# Altium PCB Red.PcbDoc (part 1 of 3)
Units mm, origin at the board's own origin, x right, y up, seen from the top; angles counter-clockwise.
Board outline 152.4 x 101.6 mm, 4 copper layers (Top Layer, VCC, GND, Bottom Layer); 97 components, 56 nets, 284 pads, 185 vias.
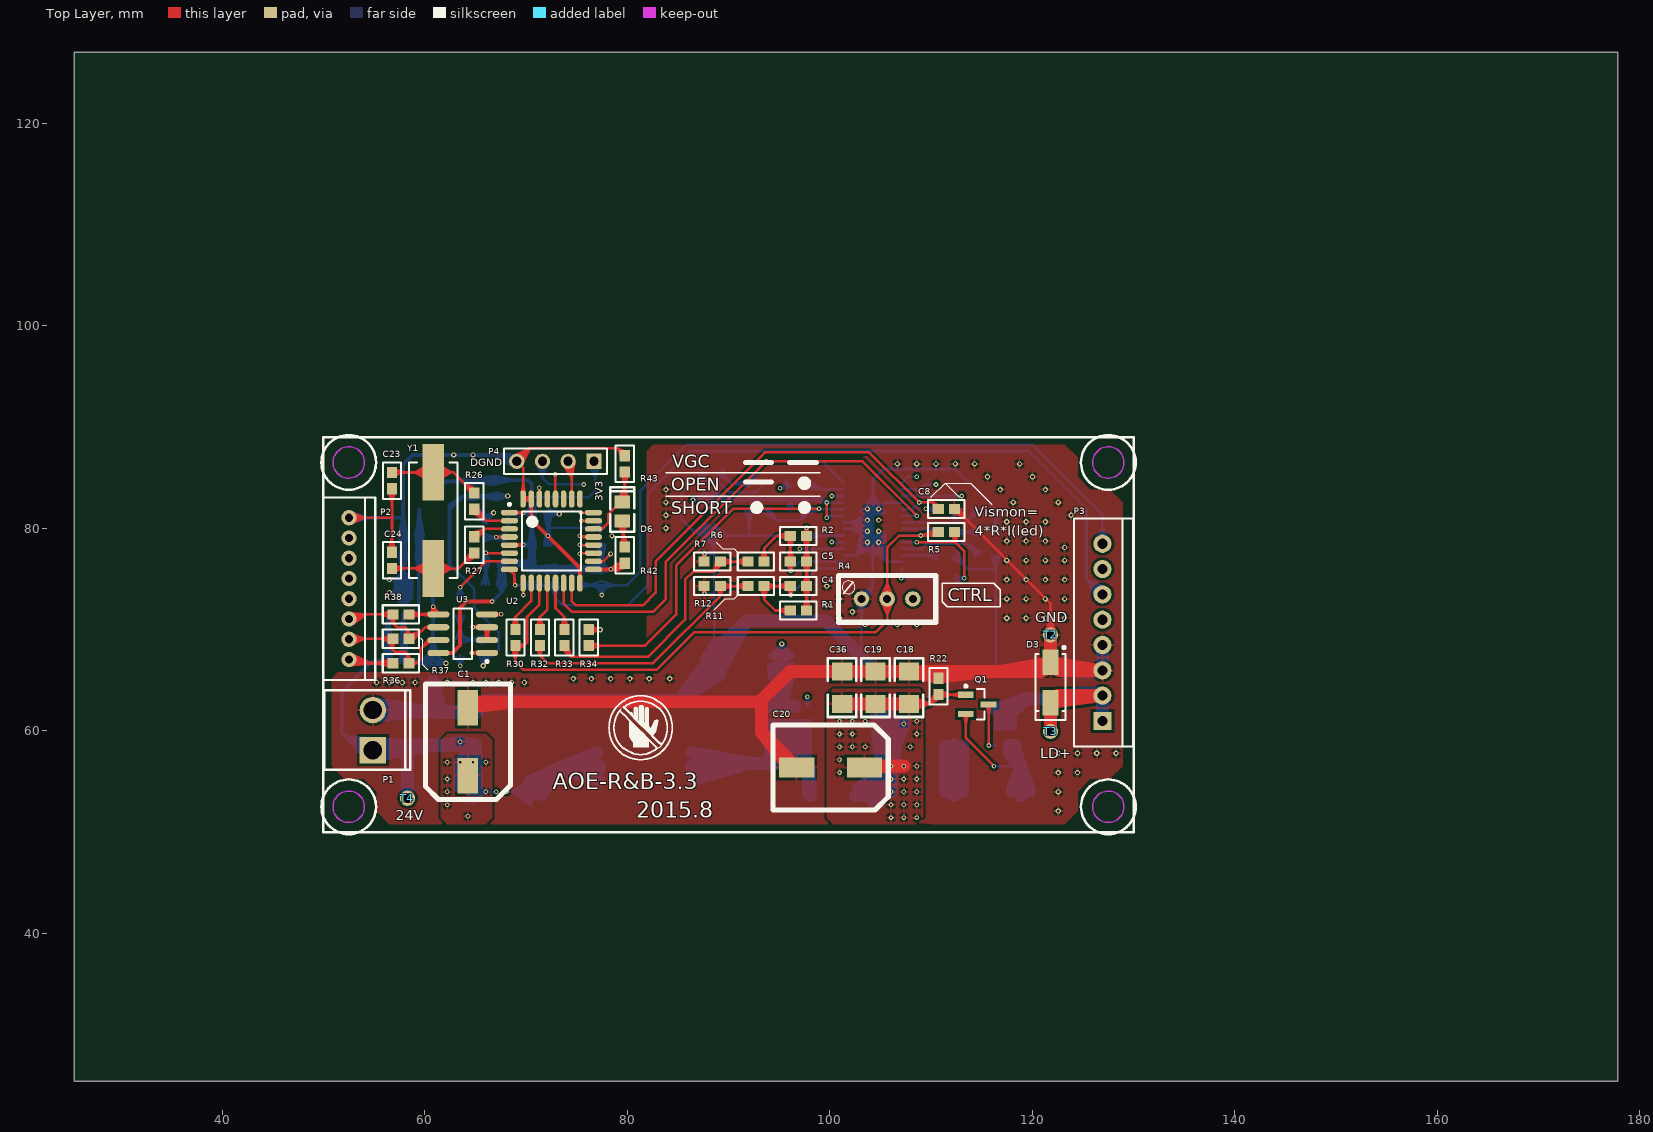
[diagram p0: Top Layer view]
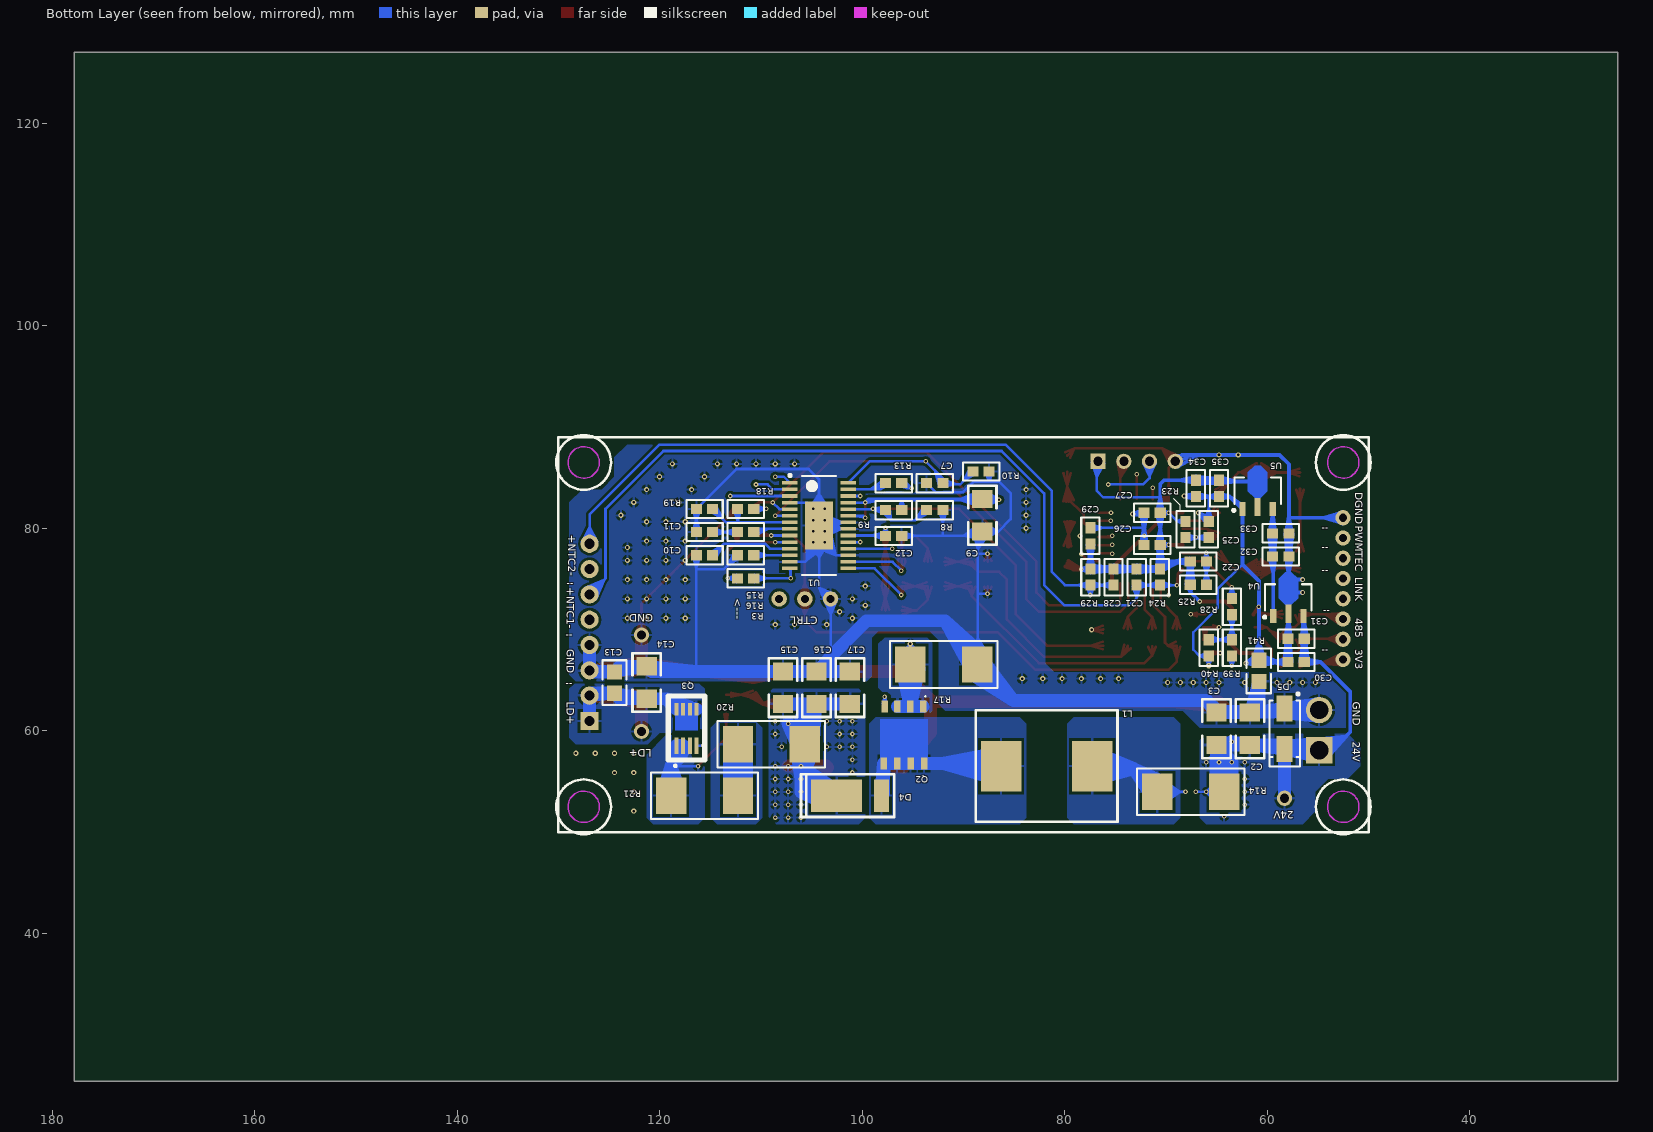
[diagram p1: Bottom Layer view, seen from below]
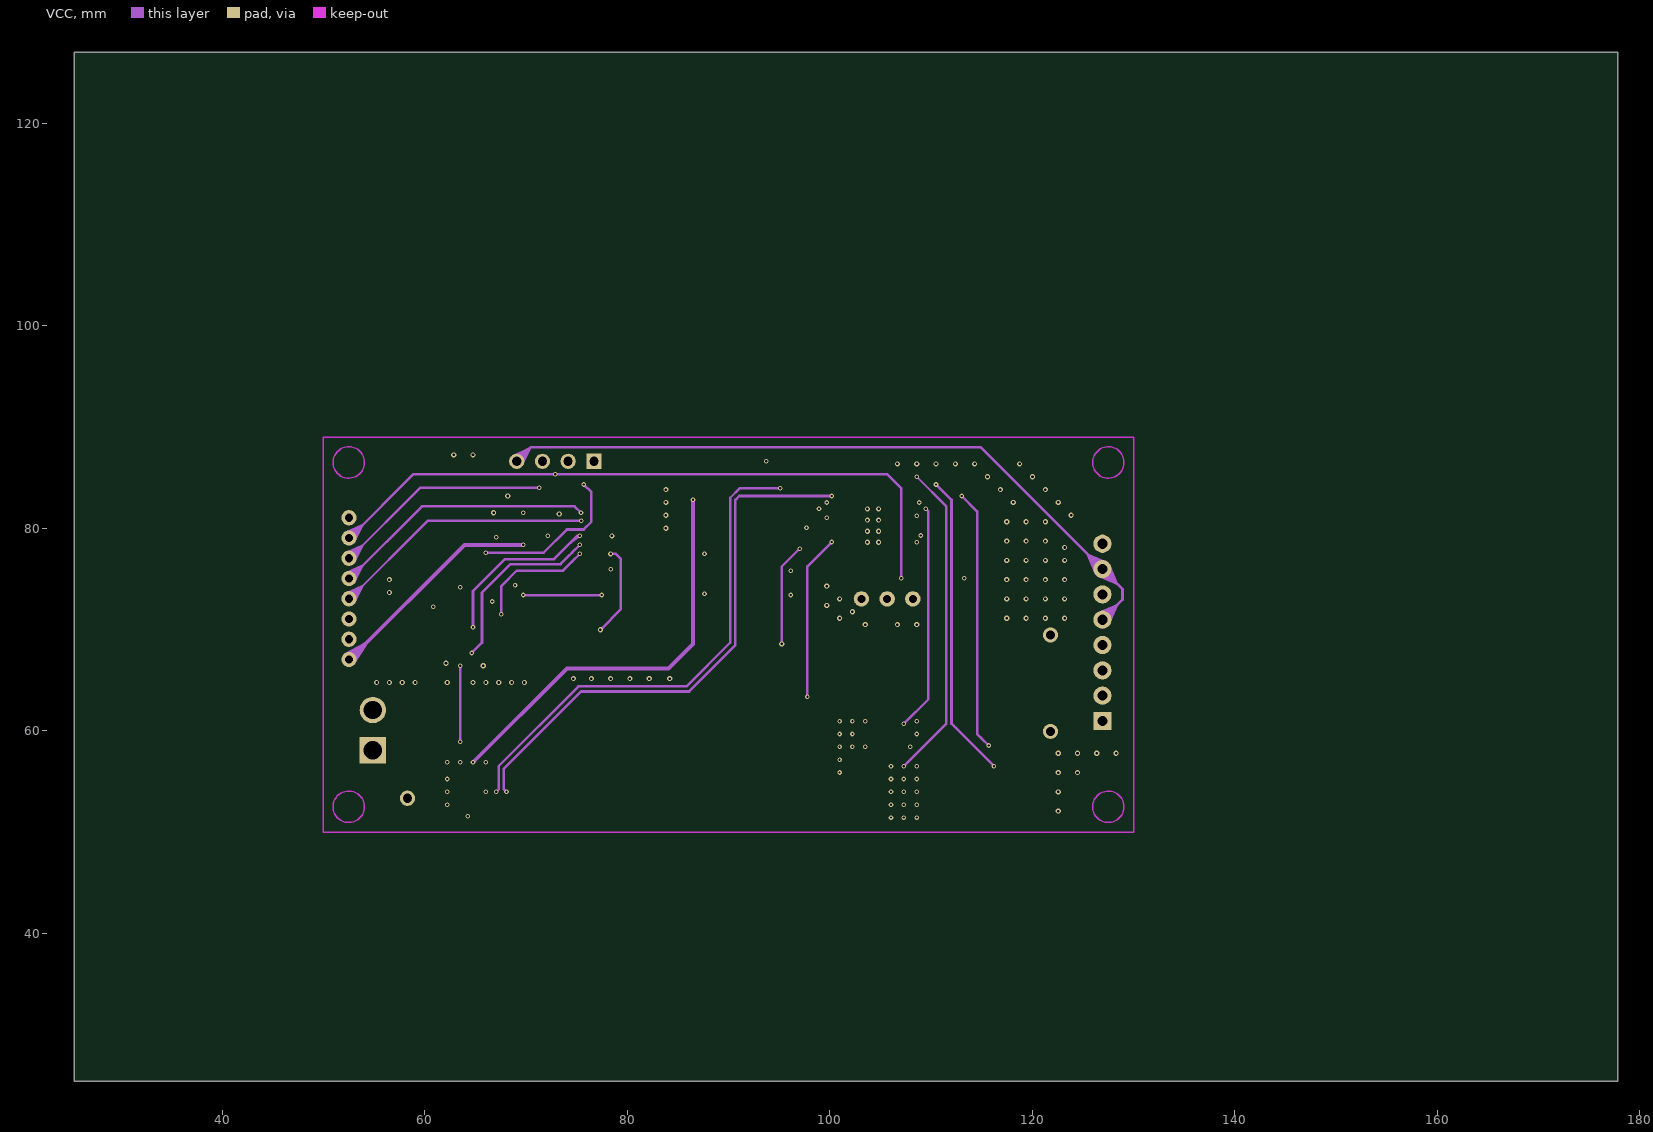
[diagram p2: VCC]
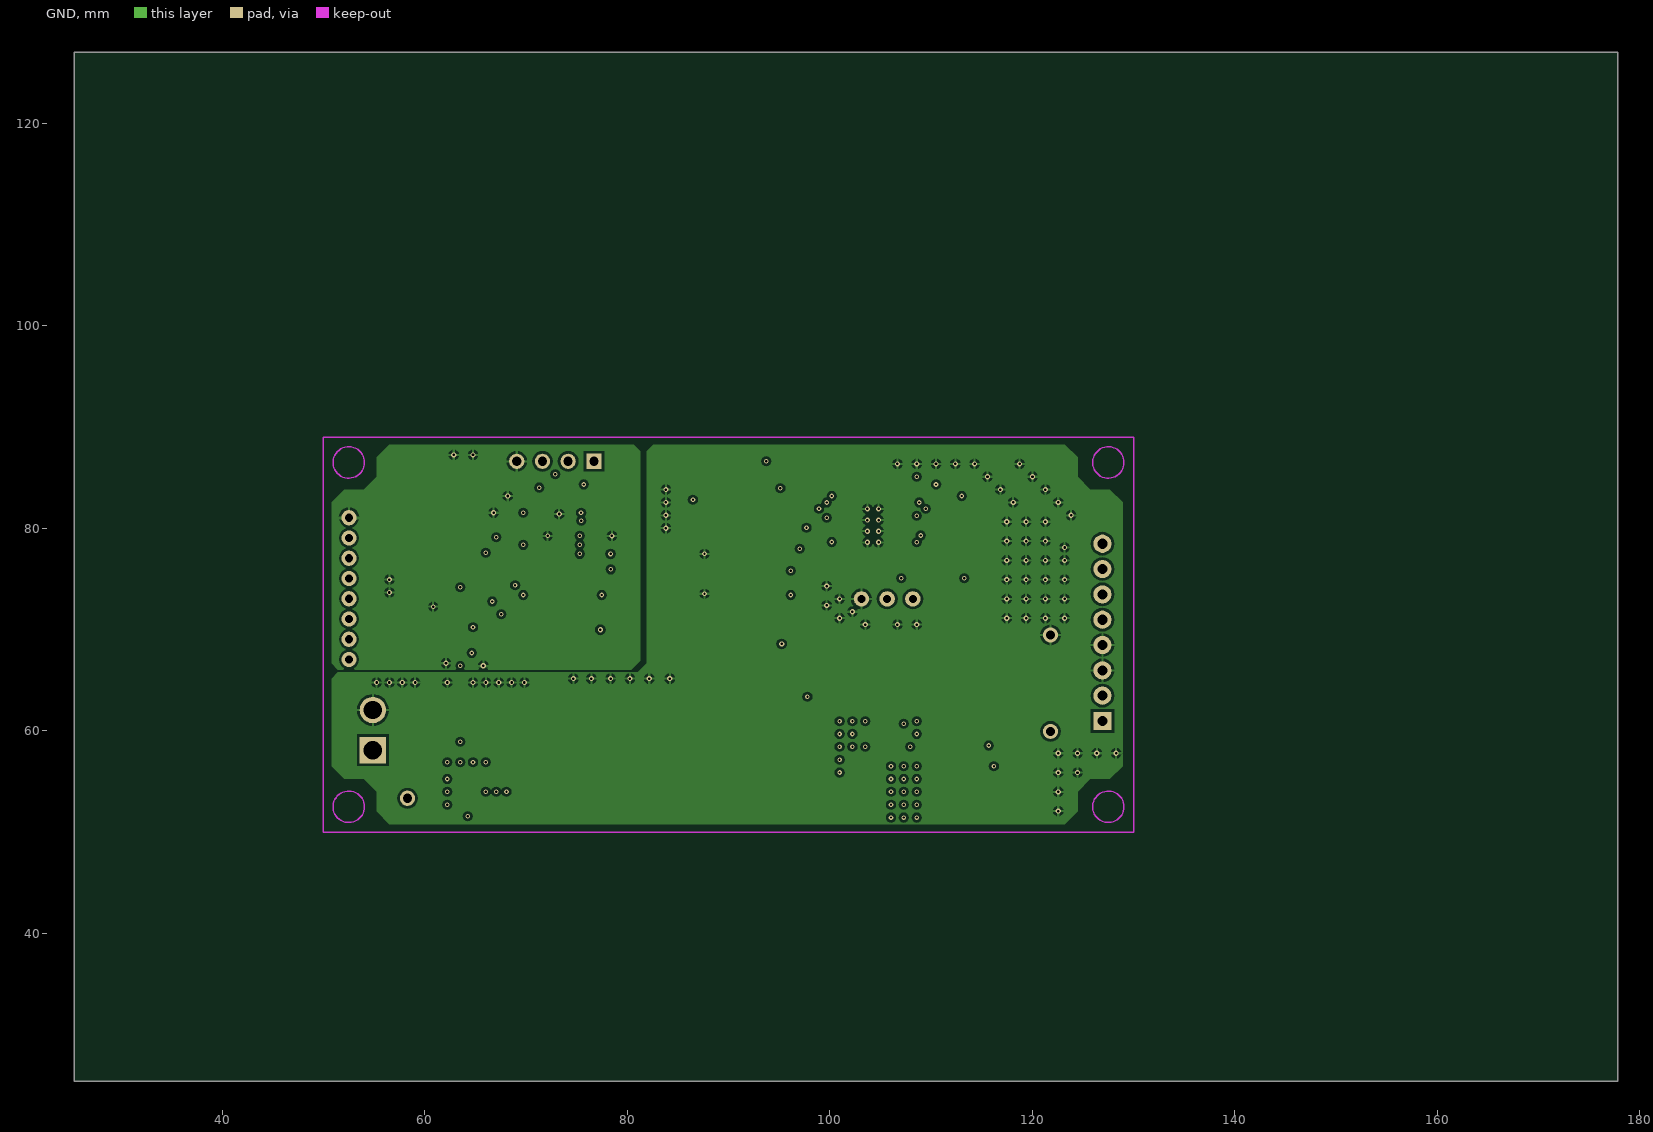
[diagram p3: GND]

## Layer stack, top to bottom
Top Layer: signal copper 0.0356
Dielectric: core 0.32, FR-4, Dk 4.8
VCC: signal copper 0.0356
Dielectric: prepreg 0.32, FR-4, Dk 4.8
GND: signal copper 0.0356
Dielectric: core 0.32, FR-4, Dk 4.8
Bottom Layer: signal copper 0.0356

## Board outline
25.4,25.4 177.8,25.4 177.8,127 25.4,127

## Design rules (kind name [scope] priority, off if disabled: settings)
Clearance [All] p1: gap=0.254
DiffPairsRouting [All] p1: maxlimit=0.254 minlimit=0.254 mostfreqgap=0.254 maxuncoupledlength=12.7
HoleSize [All] p1: absolutevalues=TRUE maxlimit=2.54 minlimit=0.198 maxpercent=80.000 minpercent=20.000
PolygonConnect [All] p1: connectstyle=Relief reliefconductorwidth=0.254 reliefentries=4 polygonreliefangle="90 Angle" airgapwidth=0.254
RoutingVias [All] p1: holewidth=0.711 width=1.27 viastyle="Through Hole" minholewidth=0.711 minwidth=1.27 maxholewidth=0.711 maxwidth=1.27
SolderMaskExpansion [All] p1: expansion=0.102
Width [All] p1: maxlimit=1.27 minlimit=0.203 preferedwidth=0.254 midlayer1_minwidth=0.254 midlayer1_maxwidth=0.381 midlayer2_minwidth=0.254 midlayer2_maxwidth=0.381 minimp=50.000000 maximp=50.000000 favimp=50.000000
26 further rules are at their usual default settings.

## Classes and differential pairs
component class PWR: C30 C31 C32 C33 C34 C35 D5 D6 P1 P2 P3 R39 R40 R41 R42 R43 T4 U4 U5
component class MCU: C21 C22 C23 C24 C25 C26 C27 C28 C29 P4 R23 R24 R25 R26 R27 R28 R29 R30 R32 R33 R34 R36 R37 R38 U2 U3 Y1
component class 3796: C1 C2 C3 C4 C5 C7 C8 C9 C10 C11 C12 C13 C14 C15 C16 C17 C18 C19 C20 C36 Ctrl D3 D4 L1 Q1 Q2 Q3 R1 R2 R3 R4 R5 R6 R7 R8 R9 R10 R11 R12 R13 R14 R15 R16 R17 R18 R19 R20 R21 R22 T2 T3 U1
differential pair CS: +CS_P -CS_N
differential pair 485: +485_P -485_N
differential pair CLK: +CLK_P -CLK_N
differential pair IS: +IS_P -IS_N
differential pair OSC: +OSC_P -OSC_N

## Components (designator, comment, footprint, x,y, rotation, side; value= is the part's Value field where it differs from the comment)
C1 "NoPop" "SMC_Altium Capacity 8*10" 64.262,58.928 r180 top
C2 "47uF/50V" "1206[3216] - NP" 61.722,60.198 r270 bottom
C3 "22uF/50V" "1206[3216] - NP" 65.024,60.198 r270 bottom
C4 "100nF" 1608[0603] 96.901,74.295 r0 top
C5 "100nF" 1608[0603] 96.901,76.708 r180 top
C7 "10nF" 1608[0603] 92.837,84.455 r180 bottom
C8 "100nF" 1608[0603] 111.506,81.915 r180 top
C9 "4.7uF/50V" "1206[3216] - NP" 88.138,81.28 r90 bottom
C10 "1uF" 1608[0603] 115.57,77.343 r0 bottom
C11 "10nF" 1608[0603] 115.57,79.629 r0 bottom
C12 "100nF" 1608[0603] 96.901,79.248 r180 bottom
C13 "2.2uF/50V" 2012[0805] 124.46,64.77 r270 bottom
C14 "NoPop" "1206[3216] - NP" 121.285,64.77 r270 bottom
C15 "47uF/50V" "1206[3216] - NP" 107.823,64.262 r270 bottom
C16 "22uF/50V" "1206[3216] - NP" 104.521,64.262 r270 bottom
C17 "22uF/50V" "1206[3216] - NP" 101.219,64.262 r270 bottom
C18 "100uF/50V" "1206[3216] - NP" 107.823,64.262 r270 top
C19 "100uF/50V" "1206[3216] - NP" 104.521,64.262 r270 top
C20 "NoPop" "SMC_Altium Capacity 8*10" 100.076,56.388 r270 top
C21 "100nF" 1608[0603] 72.898,75.184 r270 bottom
C22 "100nF" 1608[0603] 66.802,76.708 r180 bottom
C23 "20pF" 1608[0603] 56.769,84.709 r270 top
C24 "20pF" 1608[0603] 56.769,76.835 r90 top
C25 "100nF" 1608[0603] 65.786,79.883 r270 bottom
C26 "100nF" 1608[0603] 71.374,78.359 r0 bottom
C27 "100nF" 1608[0603] 71.374,81.534 r180 bottom
C28 "100nF" 1608[0603] 75.184,75.184 r270 bottom
C29 "100nF" 1608[0603] 77.47,79.248 r270 bottom
C30 "22uF" 1608[0603] 57.15,66.802 r180 bottom
C31 "22uF" 1608[0603] 57.15,69.088 r180 bottom
C32 "10uF" 1608[0603] 58.674,77.216 r0 bottom
C33 "100nF" 1608[0603] 58.674,79.502 r0 bottom
C34 "22uF" 1608[0603] 67.056,83.947 r90 bottom
C35 "10uF" 1608[0603] 64.77,83.947 r90 bottom
C36 "100uF/50V" "1206[3216] - NP" 101.219,64.262 r270 top
D3 "SMAJ36CA" SMA_DIOM5226X26N 121.793,64.77 r270 top
D4 "PDS5100" PowerDI5 99.441,53.594 r0 bottom
D5 "SMAJ26CA" SMA_DIOM5226X26N 58.293,60.198 r270 bottom
D6 "LED" "2012[0805] - LED" 79.502,81.661 r90 top
L1 "IHLP-4040DZ-11" IHLP4040 81.788,56.515 r0 bottom
P1 "VH Connector, B2P-VH" 2PIN-B2P_VH 60.579,60.071 r90 top
P2 "HY-8AD" "8P -HY-8AD" 55.118,74.041 r90 top
P3 "TJC3B-8AD" 8P-TJC3B8AD 129.921,69.723 r90 top locked
P4 "Header 4" HDR1X4 76.708,86.614 r180 top
Q1 "2N2907" SOT95P280X115-3N 114.554,62.611 r0 top
Q2 "BSC160N10NS3 G" INF-PG-TDSON-8-1_V 95.885,59.563 r0 bottom
Q3 "Si7113dn" "1212-8 SINGLE" 117.348,59.436 r90 bottom
R1 "100K" 1608[0603] 96.901,71.882 r180 top
R2 "100K" 1608[0603] 96.901,79.248 r180 top
R3 "50" 1608[0603] 111.506,75.057 r180 bottom
R4 "20K" RES-adj 105.664,73.025 r0 top
R5 "NoPop" 1608[0603] 111.506,79.629 r180 top
R6 "100K" 1608[0603] 92.71,76.708 r0 top
R7 "100K" 1608[0603] 88.392,76.708 r0 top
R8 "2K" 1608[0603] 92.837,81.788 r180 bottom
R9 "NoPop" 1608[0603] 96.901,81.788 r180 bottom
R10 "200K" 1608[0603] 88.265,85.598 r0 bottom
R11 "100K" 1608[0603] 92.71,74.295 r0 top
R12 "100K" 1608[0603] 88.392,74.295 r0 top
R13 "6K" 1608[0603] 96.901,84.455 r0 bottom
R14 "0.01" 2512[6432] 67.564,53.975 r270 bottom
R15 "10K" 1608[0603] 111.506,79.629 r0 bottom
R16 "20K" 1608[0603] 111.506,77.343 r0 bottom
R17 "0.02" 2512[6432] 91.948,66.548 r270 bottom
R18 "620K" 1608[0603] 111.506,81.915 r180 bottom
R19 "20K" 1608[0603] 115.57,81.915 r0 bottom
R20 "0.05" 2512[6432] 108.966,58.674 r90 bottom
R21 "0.2" 2512[6432] 115.57,53.594 r90 bottom
R22 "2M" 1608[0603] 110.744,64.389 r270 top
R23 "10k" 1608[0603] 68.072,79.883 r90 bottom
R24 "3K3" 1608[0603] 70.612,75.184 r270 bottom
R25 "3K3" 1608[0603] 66.802,74.422 r180 bottom
R26 "0" 1608[0603] 64.897,82.677 r270 top
R27 "390" 1608[0603] 64.897,78.359 r90 top
R28 "1K" 1608[0603] 63.5,72.263 r90 bottom
R29 "3K3" 1608[0603] 77.47,75.184 r270 bottom
R30 "20K" 1608[0603] 68.961,69.215 r270 top
R32 "1K" 1608[0603] 71.374,69.215 r270 top
R33 "1K" 1608[0603] 73.787,69.215 r270 top
R34 "50" 1608[0603] 76.2,69.215 r270 top
R36 "3K3" 1608[0603] 57.658,66.675 r180 top
R37 "120" 1608[0603] 57.658,69.088 r180 top
R38 "3K3" 1608[0603] 57.658,71.501 r180 top
R39 "50K" 1608[0603] 63.5,68.199 r90 bottom
R40 "2K" 1608[0603] 65.786,68.199 r270 bottom
R41 "0" 2012[0805] 60.833,65.913 r270 bottom
R42 "3K3" 1608[0603] 79.756,77.343 r270 top
R43 "3K3" 1608[0603] 79.756,86.36 r90 top
T2 "Test Point" TestPoint 121.793,69.469 r0 top
T3 "Test Point" TestPoint 121.793,59.944 r0 top
T4 "Test Point" TestPoint 58.293,53.34 r0 top
U1 "PWR_LT3796_Boost" TSOP65P640X120_HS-29N 104.267,80.264 r180 bottom
U2 "STM32F051K8T6" TQFP80P900X900X160-32N 72.517,78.74 r0 top
U3 "SP3485EN" SOIC127P600-8N 63.754,69.596 r180 top
U4 "L78L05" SOT89-150P410X160-3N 57.912,73.152 r90 bottom
U5 "AMS1117-3.3V" SOT89-150P410X160-3N 60.96,83.693 r90 bottom
Y1 "XTAL" XTAL_SMT 60.833,80.772 r90 top

## Footprints (in the part's own frame and the unit in brackets; to place one, negate y for a bottom-side part, rotate by r counter-clockwise, add the part's x,y. Pads: shape width x height; smd on the part's side, far side on the other; paste and mask are expansions set on the pad)
2PIN-B2P_VH [mm] "2PIN-B2P_VH"
  rect 2.6x2.6 hole 1.8: 1(-1.98,5.7)
  round 2.6 hole 1.8: 2(1.98,5.7)
  silkscreen extent -3.93,2 3.93,10.5
"8P -HY-8AD" [mm] "8Pin, HY-8AD"
  round 1.5 hole 0.8: 1(-7,2.6) 2(-5,2.6) 3(-3,2.6) 4(-1,2.6) 5(1,2.6) 6(3,2.6) 7(5,2.6) 8(7,2.6)
  silkscreen extent -9,0 9,5.1
8P-TJC3B8AD [mm] "8Pin Connector, TJC3B8AD"
  rect 1.8x1.8 hole 1: 1(-8.75,3)
  round 1.8 hole 1: 2(-6.25,3) 3(-3.75,3) 4(-1.25,3) 5(1.25,3) 6(3.75,3) 7(6.25,3) 8(8.75,3)
  silkscreen extent -11.25,0 11.25,5.8
"1206[3216] - NP" [mm] "Chip Resistor; Body 3.2 x 1.6 mm (LxW typ)"
  rect 1.8x2 smd: 1(-1.6,0) 2(1.6,0)
  silkscreen extent -2.9,-1.4 2.9,1.4, body extent -2.2,-0.8 2.2,0.8, height 3
"1212-8 SINGLE" [mm] "P-Channel 100-V (D-S) MOSFET"
  rect 1.6x0.405 smd: 1(-0.9,0.99) 2(-0.9,0.33) 3(-0.9,-0.33) 4(-0.9,-0.99)
  rect 1.2x0.405 smd: 5(2.7,-0.99) 6(2.7,-0.33) 7(2.7,0.33) 8(2.7,0.99)
  Top Layer region: 0.637,-1.12 2.362,-1.12 2.362,1.12 0.637,1.12
  silkscreen extent -3,-1.8 4,1.8
1608[0603] [mm]
  rect 1.1x1 smd: 1(-0.8,0) 2(0.8,0)
  silkscreen extent -1.8,-0.9 1.8,0.9
2012[0805] [mm] "Chip Resistor; Body 2.0 x 1.3 mm (LxW typ)"
  rect 1.5x1.5 smd: 1(-1.05,0) 2(1.05,0)
  silkscreen extent -2.2,-1.2 2.2,1.2, body extent -1.8,-0.7 1.8,0.7, height 3
"2012[0805] - LED" [mm] "Chip Resistor; Body 2.0 x 1.3 mm (LxW typ)"
  rect 1.3x1.5 smd: 1(-0.95,0) 2(0.95,0)
  silkscreen extent -2,-1.2 2.4,1.2
2512[6432] [mm] "6.4*3.2"
  rect 3.6x3 smd: 1(0,3.3) 2(0,-3.3)
  silkscreen extent -2.3,-5.3 2.3,5.3
HDR1X4 [mm] "Connector; Header; 4 Position"
  rect 1.5x1.5 hole 0.9: 1(0,0)
  round 1.5 hole 0.9: 2(2.54,0) 3(5.08,0) 4(7.62,0)
  silkscreen extent -1.27,-1.27 8.89,1.27
IHLP4040 [mm] "Inductor, IHLP5050CEER1R0M01"
  rect 4x5 smd: 1(-4.5,0) 2(4.5,0)
  silkscreen extent -7,-5.5 7,5.5
INF-PG-TDSON-8-1_V [mm] "TDSON, 8-Leads, Body 6.15x5.15mm, Pitch 1.27mm"
  rect 0.65x1.2 smd: 1(-1.905,-2.825) 2(-0.635,-2.825) 3(0.635,-2.825) 4(1.905,-2.825) 5(2.007,2.794) 6(0.66,2.794) 7(-0.66,2.794) 8(-2.007,2.794)
  Top Layer region: -2.35,2.925 -2.35,-1.575 2.35,-1.575 2.35,2.925
  Top Layer region: -2.35,2.925 -1.65,2.925 -1.65,3.425 -2.35,3.425
  Top Layer region: 1.65,2.925 2.35,2.925 2.35,3.425 1.65,3.425
  Top Layer region: -1.015,2.925 -0.315,2.925 -0.315,3.425 -1.015,3.425
  Top Layer region: 0.315,2.925 1.015,2.925 1.015,3.425 0.315,3.425
  silkscreen extent -2.23,-3.94 -2.03,-3.74, body extent -2.58,-3.08 2.58,3.08, height 1
PowerDI5 [mm]
  rect 1.5x3.2 smd: 1(-1.35,0)
  rect 5x3.2 smd: 2(3.1,0)
  silkscreen extent -2.6,-2.1 6.6,2.1
RES-adj [mil]
  round 60 hole 31.5: 1(-100,0) 2(0,0) 3(100,0)
  silkscreen extent -189,-91 189,91
SMA_DIOM5226X26N [mm] "Molded Diode, 2-Leads, Body 5.20x2.61mm, IPC Medium Density"
  rect 2.55x1.55 smd: 1(-2,0) 2(2,0)
  silkscreen extent -3.57,-1.5 3.7,1.5, body extent -2.8,-1.46 2.79,1.46, height 2.62
"SMC_Altium Capacity 8*10" [mm] "SMC_Altium Capcitor, 8*10"
  rect 2x3.5 smd: 1(0,3.35) 2(0,-3.35)
  silkscreen extent -4.2,-5.7 4.2,5.7
SOIC127P600-8N [mm]
  oval 2.2x0.6 smd: 1(-2.4,1.905) 2(-2.4,0.635) 3(-2.4,-0.635) 4(-2.4,-1.905) 5(2.4,-1.905) 6(2.4,-0.635) 7(2.4,0.635) 8(2.4,1.905)
  silkscreen extent -2.53,-2.5 0.9,2.88, body extent -2,-2.5 2,2.5, height 1.75
SOT89-150P410X160-3N [mm] "SOT89, 3-Leads, Body 4.50x2.45mm, Pitch 1.50mm, Lead Span 4.1mm, IPC Medium Density"
  rect 1.4x0.6 smd: 1(-1.8,1.5) 3(-1.8,-1.5)
  rect 1.8x0.6 smd: 2(-1.6,0)
  Top Layer region: -0.7,0.3 -0.05,0.95 1.85,0.95 2.5,0.3 2.5,-0.3 1.85,-0.95 -0.05,-0.95 -0.7,-0.3
  silkscreen extent -2.05,-2.3 1.32,2.48, body extent -1.28,-2.3 1.32,2.3, height 1.6
SOT95P280X115-3N [mm] "SOT23, 3-Leads, Body 2.90x2.80mm, Pitch 0.95mm, IPC Medium Density"
  rect 1.55x0.6 smd: 1(-1.125,0.95) 2(-1.125,-0.95) 3(1.125,0)
  silkscreen extent -1.25,-1.5 0.7,1.92, body extent -0.7,-1.5 0.7,1.5, height 1.15
TestPoint [mm] "TestPoint"
  round 1.5 hole 0.9: 1(0,0)
TQFP80P900X900X160-32N [mm] "TQFP, 32-Leads, Body 7.00x7.00mm, Pitch 0.80mm, IPC Medium Density"
  oval 1.7x0.55 smd: 1(-4.15,2.8) 2(-4.15,2) 3(-4.15,1.2) 4(-4.15,0.4) 5(-4.15,-0.4) 6(-4.15,-1.2) 7(-4.15,-2) 8(-4.15,-2.8) 17(4.15,-2.8) 18(4.15,-2) 19(4.15,-1.2) 20(4.15,-0.4) 21(4.15,0.4) 22(4.15,1.2) 23(4.15,2) 24(4.15,2.8)
  oval 0.55x1.7 smd: 9(-2.8,-4.15) 10(-2,-4.15) 11(-1.2,-4.15) 12(-0.4,-4.15) 13(0.4,-4.15) 14(1.2,-4.15) 15(2,-4.15) 16(2.8,-4.15) 25(2.8,4.15) 26(2,4.15) 27(1.2,4.15) 28(0.4,4.15) 29(-0.4,4.15) 30(-1.2,4.15) 31(-2,4.15) 32(-2.8,4.15)
  silkscreen extent -4.27,-2.9 2.9,3.75, body extent -3.5,-3.5 3.5,3.5, height 1.6
TSOP65P640X120_HS-29N [mm] "TSOP, 28-Leads, Body 9.70x4.40mm, Pitch 0.65mm, Thermal Pad 4.75.2x2.74.2mm, IPC Medium Density"
  rect 1.55x0.35 smd: 1(-2.875,4.225) 2(-2.875,3.575) 3(-2.875,2.925) 4(-2.875,2.275) 5(-2.875,1.625) 6(-2.875,0.975) 7(-2.875,0.325) 8(-2.875,-0.325) 9(-2.875,-0.975) 10(-2.875,-1.625) 11(-2.875,-2.275) 12(-2.875,-2.925) 13(-2.875,-3.575) 14(-2.875,-4.225) 15(2.875,-4.225) 16(2.875,-3.575) 17(2.875,-2.925) 18(2.875,-2.275) 19(2.875,-1.625) 20(2.875,-0.975) 21(2.875,-0.325) 22(2.875,0.325) 23(2.875,0.975) 24(2.875,1.625) 25(2.875,2.275) 26(2.875,2.925) 27(2.875,3.575) 28(2.875,4.225)
  rect 2.74x4.75 smd: 29(0,0)
  silkscreen extent -3,-4.9 1.7,5.07, body extent -2.25,-4.9 2.25,4.9, height 1.2
XTAL_SMT [mm]
  rect 5.6x2.1 smd: 1(-4.75,0) 2(4.75,0)
  silkscreen extent -5.7,-2.4 5.7,2.4

## Part data
C1 C20: library part "Cap Pol1", "Polarized Capacitor (Radial)"
C2 C3 C4 C5 C7 C8 C9 C10 C11 C12 C13 C14 C15 C16 C17 C18 C19 C21 C22 C23 C24 C25 C26 C27 C28 C29 C30 C31 C32 C33 C34 C35 C36: library part Cap, "Capacitor"
D3 D4 D5: library part "D Schottky", "Schottky Diode"
D6: library part LED0, "Typical INFRARED GaAs LED"
L1: library part Inductor, "Inductor"
P1: library part "Header 2", "Header, 2-Pin"
P2 P3: library part "Header 8", "Header, 8-Pin"
P4: "Header, 4-Pin"
Q1: library part 2N3906, "PNP General Purpose Amplifier"
Q2: "N-Channel OptiMOS 3 Power-Transistor, 100 V VDS, 42 A ID, -55 to 150 degC, PG-TDSON-8-1, Reel, Green"
Q3: library part "PWR_ Si7113dn", "PMOS, Si7113dn"
R1 R2 R3 R5 R6 R7 R8 R9 R10 R11 R12 R13 R14 R15 R16 R17 R18 R19 R20 R21 R22 R23 R24 R25 R26 R27 R28 R29 R30 R32 R33 R34 R36 R37 R38 R39 R40 R41 R42 R43: library part Res1, "Resistor"
R4: library part "Res Adj1", "Variable Resistor"
T2 T3 T4: library part TP
U1: "100V Constant-Current and   Constant-Voltage Controller   with Dual Current Sense"
U2: library part MCU_STM32F051K8T6, "Low- and medium-density advanced ARM?-based 32-bit MCU with  16 to 64 Kbytes Flash, timers, ADC, DAC and comm. interfaces"
U3: library part LGC_RS485, "Low-Power, Slew-Rate-Limited  RS-485/RS-422 Transceivers"
U4: library part PWR_L78L05, "POSITIVE VOLTAGE REGULATORS"
U5: library part PWR_LM1XXX, "5Vת3V3 10mA  DC/DC"
Y1: "Crystal Oscillator"

## Via types
v1: diameter 0.457, hole 0.229, Top Layer to Bottom Layer, tented both sides, 92 vias
v2: diameter 0.508, hole 0.254, Top Layer to Bottom Layer, tented both sides, 85 vias
v3: diameter 0.508, hole 0.254, Top Layer to Bottom Layer, 8 vias

## Nets (pads, with @x,y where several pads share a name; then routed paths per layer and width w, separated by ;. In a path a pad name is that pad's centre, name@x,y a point inside that pad or via, vN(x,y) a via of type N, cw(c..) or ccw(c..) an arc to the next point about the centre after c; other vN are vias at no path point)
3V3: C21.1 C22.1 C26.1 C27.2 C28.1 C29.2 C34.2 C35.2 P2.1 P4.1 R23.2 R24.1 R25.1 R29.1 R36.2 R42.2 U2.1 U2.5 U2.17 U3.8 U5.2 | length 365.9
  Top Layer w0.381: P2.1@52.494,66.482 54.535,66.675 ; P2.1@52.518,67.041 54.535,66.675 ; P2.1@52.692,67.573 54.535,66.675 ; P2.1@52.966,66.675 56.731,66.675 R36.2@56.731,66.459 ; R36.2@56.779,66.367 55.165,66.675 ; R36.2@56.779,66.983 55.165,66.675 ; R36.2@56.808,66.675 55.165,66.675 ; U3.8@61.354,67.691 62.738,67.691 ; U3.8@62.154,67.691 62.738,67.691 ; v1(66.675,72.771) 64.135,72.771 63.5,72.136 63.5,68.453 62.738,67.691 ; U2.5@68.367,78.34 U2.5@68.386,78.359 ; U2.1@68.367,81.54 U2.1@68.373,81.534 ; U2.17@76.667,75.94 v1(78.359,75.94) ; U2.17@76.987,75.94 v1(78.359,75.94) ; R42.2@79.613,76.768 v1(78.359,75.94) ; R42.2@79.756,76.543 79.153,75.94 ; R42.2@79.84,76.195 v1(78.359,75.94) ; U2.1@68.373,81.534 v1(69.723,81.534) ; U2.1@68.373,81.534 v1(69.723,81.534) ; U2.5@68.386,78.359 v1(69.723,78.359) ; U2.5@68.386,78.359 v1(69.723,78.359) ; v1(69.723,78.359) 68.942,78.34 v1(69.723,78.359) ; v1(69.723,81.534) 68.942,81.54 v1(69.723,81.534) ; v1(78.359,75.94) 77.242,75.94 v1(78.359,75.94) ; v1(78.359,75.94) R42.2@79.756,76.493 ; v1(78.359,75.94) 79.153,75.94 ; 79.153,75.94 R42.2@79.756,76.493 ; 79.153,75.94 79.507,76.677 79.153,75.94 ; 79.153,75.94 79.918,76.229 79.153,75.94 ; 79.153,75.94 R42.2@79.756,76.493
  VCC w0.381: P2.1@52.188,67.493 54.116,68.557 ; P2.1@52.518,67.041 54.116,68.557 ; P2.1@52.6,67.041 63.918,78.359 v1(69.723,78.359) ; P2.1@52.952,66.687 54.116,68.557
  Bottom Layer w0.254: R23.2@68.072,80.683 68.872,80.683 ; R23.2@68.159,80.32 68.872,80.683 ; R23.2@68.159,81.046 68.872,80.683 ; v1(69.723,81.534) 68.872,80.683 ; 70.574,83.058 76.2,83.058 76.835,83.693 76.835,86.487 P4.1@76.708,86.614 76.835,85.095 ; P4.1@76.111,86.436 76.835,85.095 ; P4.1@76.347,86.539 76.835,85.095 ; P4.1@77.077,86.6 76.835,85.095 ; P4.1@77.326,86.538 76.835,85.095
  Bottom Layer w0.381: 60.96,84.582 60.998,84.62 C34.2@67.056,84.62 ; C35.2@64.718,85.052 63.115,84.62 ; C35.2@64.765,84.438 63.115,84.62 ; C35.2@64.77,84.747 63.115,84.62 ; C35.2@64.785,84.388 66.423,84.62 ; C35.2@64.813,85.003 66.423,84.62 ; v1(66.675,72.771) 67.602,73.698 ; C34.2@66.986,84.999 65.428,84.479 ; C34.2@67.004,85.052 65.4,84.62 ; C34.2@67.011,84.491 C35.2@65.154,84.922 ; C34.2@67.028,85.055 C35.2@64.77,84.697 ; C34.2@67.042,84.438 C35.2@64.77,84.697 ; C34.2@67.051,84.438 65.4,84.62 ; C34.2@67.051,85.106 C35.2@65.154,84.922 ; C34.2@67.056,84.797 C35.2@65.154,84.922 ; C34.2@67.068,84.388 65.428,84.479 ; C34.2@67.085,84.439 68.699,84.747 C34.2@67.085,85.055 ; R25.1@67.243,74.424 67.408,76.083 ; R25.1@67.294,74.451 67.602,76.065 R25.1@67.91,74.451 ; C22.1@67.294,76.679 67.602,75.065 ; R25.1@67.3,74.356 67.602,73.698 ; R25.1@67.347,74.477 67.796,76.083 ; R25.1@67.552,74.422 67.408,76.083 ; R25.1@67.652,74.422 67.796,76.083 ; C22.1@67.652,76.708 69.295,76.708 ; C22.1@67.681,76.4 69.295,76.708 ; C22.1@67.681,77.016 69.295,76.708 ; R25.1@67.857,74.477 67.408,76.083 ; R25.1@67.904,74.356 67.602,73.698 ; C22.1@67.91,76.679 67.602,75.065 ; R25.1@67.961,74.424 67.796,76.083 ; C26.1@70.266,78.33 70.574,76.716 ; C26.1@70.266,78.388 70.574,80.002 C26.1@70.882,78.388 ; C27.2@70.266,81.505 70.574,79.891 C27.2@70.882,81.505 ; C27.2@70.266,81.565 70.574,83.058 ; R24.1@70.303,76.021 70.39,77.68 ; R24.1@70.303,76.056 70.574,77.678 ; R24.1@70.308,76.09 70.77,77.743 ; C26.1@70.464,78.055 v1(69.723,78.359) ; C26.1@70.464,78.663 v1(69.723,78.359) ; C27.2@70.464,81.23 v1(69.723,81.534) ; C27.2@70.464,81.838 v1(69.723,81.534) ; R24.1@70.488,75.75 68.685,76.708 ; C26.1@70.524,78.359 v1(69.723,78.359) ; C27.2@70.524,81.534 v1(69.723,81.534) ; R24.1@70.634,76.293 72.256,76.022 ; R24.1@70.648,75.677 72.256,76.022 ; R24.1@70.692,76.333 68.685,76.708 ; C26.1@70.882,78.33 70.574,76.716 ; C27.2@70.882,81.565 70.574,83.058 ; R24.1@70.914,76.104 70.39,77.68 ; R24.1@70.919,76.07 70.574,77.678 ; R24.1@70.921,76.033 70.77,77.743 ; C21.1@72.84,75.73 71.257,76.189 ; C21.1@72.845,76.239 71.195,75.794 ; C21.1@72.862,75.677 71.254,76.022 ; C21.1@72.876,76.293 71.254,76.022 ; C21.1@72.877,75.675 R24.1@70.612,75.984 ; C21.1@72.877,76.293 R24.1@70.612,75.984 ; C21.1@72.895,75.625 71.195,75.794 ; C21.1@72.898,75.934 71.195,75.794 ; C21.1@72.898,76.343 71.257,76.189 ; C21.1@72.92,76.293 74.542,76.022 ; C21.1@72.934,75.677 74.542,76.022 ; C28.1@75.126,75.73 73.543,76.189 ; C28.1@75.131,76.239 73.481,75.794 ; C28.1@75.148,75.677 73.54,76.022 ; C28.1@75.162,76.293 73.54,76.022 ; C28.1@75.163,75.675 C21.1@72.898,75.984 ; C28.1@75.163,76.293 C21.1@72.898,75.984 ; C28.1@75.181,75.625 73.481,75.794 ; C28.1@75.184,75.934 73.481,75.794 ; C28.1@75.184,76.343 73.543,76.189 ; C28.1@75.206,76.293 76.828,76.022 ; C28.1@75.22,75.677 76.828,76.022 ; R29.1@77.162,76.063 77.47,77.677 ; C29.2@77.162,78.369 77.47,76.755 ; R29.1@77.412,75.73 75.829,76.189 ; R29.1@77.417,76.239 75.766,75.794 ; R29.1@77.434,75.677 75.826,76.022 ; R29.1@77.448,76.293 75.826,76.022 ; R29.1@77.449,75.675 C28.1@75.184,75.984 ; R29.1@77.449,76.293 C28.1@75.184,75.984 ; R29.1@77.467,75.625 75.766,75.794 ; R29.1@77.47,75.934 75.766,75.794 ; R29.1@77.47,76.343 75.829,76.189 ; C29.2@77.47,78.398 77.47,76.755 ; C29.2@77.47,78.448 R29.1@77.47,75.984 ; R29.1@77.778,76.063 77.47,77.677 ; C29.2@77.778,78.369 77.47,76.755 ; C35.2@64.77,84.697 C34.2@67.056,84.747 ; C35.2@64.77,84.697 66.423,84.62 ; 65.4,84.62 C34.2@67.056,84.747 ; 65.428,84.479 C34.2@67.056,84.697 ; 66.423,84.62 C34.2@67.056,84.697 ; 66.423,84.62 C34.2@66.945,84.986 ; 66.423,84.62 C34.2@67.018,84.39 ; 66.423,84.62 C34.2@67.056,84.697 ; 66.423,84.62 C34.2@66.945,84.986 ; 66.423,84.62 C34.2@67.018,84.39 ; 66.423,84.62 C34.2@67.056,84.697 ; 66.423,84.62 C34.2@66.945,84.986 ; 66.423,84.62 C34.2@67.018,84.39 ; C34.2@67.056,84.747 70.193,84.747 70.574,84.366 70.574,83.058 ; 67.602,73.698 R25.1@67.602,74.422 ; R25.1@67.602,74.422 67.602,75.065 ; R25.1@67.602,74.422 67.602,75.065 ; R25.1@67.602,74.422 C22.1@67.602,76.708 70.574,76.708 ; 67.602,75.065 67.902,74.496 67.602,75.065 ; 67.602,75.065 67.302,74.496 67.602,75.065 ; 68.685,76.708 R24.1@70.612,76.034 ; v1(69.723,78.359) C26.1@70.574,78.359 ; v1(69.723,81.534) C27.2@70.574,81.534 ; R24.1@70.307,76.088 70.574,76.708 ; R24.1@70.307,76.088 70.574,76.708 ; R24.1@70.307,76.088 70.574,76.708 ; 70.39,77.68 R24.1@70.612,76.034 ; 70.574,76.708 R24.1@70.612,76.034 ; 70.574,76.708 R24.1@70.909,76.122 ; 70.574,76.708 R24.1@70.612,76.034 ; 70.574,76.708 R24.1@70.909,76.122 ; 70.574,76.708 R24.1@70.612,76.034 ; 70.574,76.708 R24.1@70.909,76.122 ; 70.574,76.708 70.574,76.022 77.432,76.022 R29.1@77.47,75.984 ; 70.574,76.708 C26.1@70.574,78.359 ; 70.574,76.716 R24.1@70.612,76.034 ; 70.574,76.716 R24.1@70.909,76.121 ; 70.574,76.716 70.307,76.087 70.574,76.716 ; 70.574,76.716 R24.1@70.612,76.034 ; 70.574,76.716 R24.1@70.909,76.121 ; 70.574,77.678 R24.1@70.612,76.034 ; C26.1@70.574,78.359 C27.2@70.574,81.534 ; C27.2@70.574,81.534 70.574,83.058 ; R24.1@70.612,75.984 C21.1@72.898,75.984 ; R24.1@70.612,75.984 72.256,76.022 ; R24.1@70.612,76.034 70.77,77.743 ; 71.254,76.022 C21.1@72.898,75.984 ; 71.257,76.189 C21.1@72.898,76.034 ; 72.256,76.022 C21.1@72.898,76.034 ; 72.256,76.022 C21.1@72.818,76.333 ; 72.256,76.022 C21.1@72.829,75.732 ; 72.256,76.022 C21.1@72.898,76.034 ; 72.256,76.022 C21.1@72.818,76.333 ; 72.256,76.022 C21.1@72.829,75.732 ; 72.256,76.022 C21.1@72.898,76.034 ; 72.256,76.022 C21.1@72.818,76.333 ; 72.256,76.022 C21.1@72.829,75.732 ; C21.1@72.898,75.984 C28.1@75.184,75.984 ; C21.1@72.898,75.984 74.542,76.022 ; 73.54,76.022 C28.1@75.184,75.984 ; 73.543,76.189 C28.1@75.184,76.034 ; 74.542,76.022 C28.1@75.184,76.034 ; 74.542,76.022 C28.1@75.104,76.333 ; 74.542,76.022 C28.1@75.115,75.732 ; 74.542,76.022 C28.1@75.184,76.034 ; 74.542,76.022 C28.1@75.104,76.333 ; 74.542,76.022 C28.1@75.115,75.732 ; 74.542,76.022 C28.1@75.184,76.034 ; 74.542,76.022 C28.1@75.104,76.333 ; 74.542,76.022 C28.1@75.115,75.732 ; C28.1@75.184,75.984 R29.1@77.47,75.984 ; C28.1@75.184,75.984 76.828,76.022 ; 75.826,76.022 R29.1@77.47,75.984 ; 75.829,76.189 R29.1@77.47,76.034 ; 76.828,76.022 R29.1@77.47,76.034 ; 76.828,76.022 R29.1@77.39,76.333 ; 76.828,76.022 R29.1@77.401,75.732 ; 76.828,76.022 R29.1@77.47,76.034 ; 76.828,76.022 R29.1@77.39,76.333 ; 76.828,76.022 R29.1@77.401,75.732 ; 76.828,76.022 R29.1@77.47,76.034 ; 76.828,76.022 R29.1@77.39,76.333 ; 76.828,76.022 R29.1@77.401,75.732 ; R29.1@77.47,75.984 v1(78.359,75.94) ; R29.1@77.47,75.984 v1@78.315,75.984 ; R29.1@77.47,76.034 77.47,77.677 ; v1@78.315,75.984 77.527,75.68 v1(78.359,75.94) ; v1@78.315,75.984 77.527,76.288 v1(78.359,75.94)
5V: C32.2 C33.2 U4.1 U5.3 | length 58
  Bottom Layer w0.381: C33.2@59.115,79.504 59.261,77.867 ; C32.2@59.165,77.199 59.412,75.57 ; C32.2@59.165,77.233 59.412,78.861 ; C33.2@59.165,79.481 C32.2@59.474,77.216 ; C33.2@59.165,79.485 59.412,77.855 ; C33.2@59.166,79.531 59.474,81.145 ; C33.2@59.219,79.45 59.665,77.759 ; 59.262,80.032 U5.3@59.46,81.493 ; U4.1@59.412,71.352 59.412,79.44 C33.2@59.474,79.502 ; U4.1@59.412,71.752 59.412,73.195 ; 59.474,80.05 U5.3@59.46,81.493 ; U5.3@59.474,81.879 C33.2@59.474,79.502 ; C33.2@59.524,79.502 59.665,77.759 ; 59.684,80.044 U5.3@59.46,81.493 ; C33.2@59.728,79.442 59.261,77.867 ; C32.2@59.781,77.175 59.412,75.57 ; C32.2@59.781,77.257 59.412,78.861 ; C33.2@59.781,79.461 59.412,77.855 ; C33.2@59.783,79.481 C32.2@59.474,77.216 ; C33.2@59.782,79.531 59.474,81.145 ; C33.2@59.833,79.5 59.665,77.759 ; C33.2@59.122,79.433 59.412,78.861 ; C33.2@59.122,79.433 59.412,78.861 ; C33.2@59.122,79.433 59.412,78.861 ; 59.261,77.867 C33.2@59.424,79.502 ; 59.412,75.57 C32.2@59.474,77.216 ; 59.412,77.855 C33.2@59.474,79.502 ; 59.412,78.861 C33.2@59.424,79.502 ; 59.412,78.861 C33.2@59.723,79.422 ; 59.412,78.861 C33.2@59.424,79.502 ; 59.412,78.861 C33.2@59.723,79.422 ; 59.412,78.861 C33.2@59.424,79.502 ; 59.412,78.861 C33.2@59.723,79.422 ; 59.412,78.861 C32.2@59.474,77.216 ; U5.3@59.46,81.493 59.474,81.145 ; U5.3@59.46,81.493 59.474,81.145 ; C32.2@59.474,77.216 C33.2@59.474,79.502
485_N: P2.3 R37.1 R38.2 U3.6 | length 34.2
  Top Layer w0.254: P2.3@52.461,71.406 54.256,71.501 ; P2.3@52.465,71.662 54.256,71.501 ; P2.3@52.518,71.041 54.256,71.501 ; P2.3@52.6,71.041 53.06,71.501 R38.2@56.858,71.501 56.858,70.65 ; P2.3@52.649,70.696 54.256,71.501 ; P2.3@52.779,70.475 54.256,71.501 ; R38.2@56.494,71.419 56.858,70.65 ; R38.2@56.753,71.132 55.546,71.501 ; R38.2@56.753,71.87 55.546,71.501 ; R38.2@56.808,71.501 55.546,71.501 ; R38.2@57.222,71.419 56.858,70.65 ; R37.1@58.038,69.136 58.331,69.939 ; R37.1@58.343,69.422 59.748,69.908 ; R37.1@58.408,69.088 58.331,69.939 ; R37.1@58.508,69.088 59.748,69.908 ; R37.1@58.751,68.805 59.748,69.908 ; R37.1@58.763,69.202 58.331,69.939 ; U3.6@60.523,70.061 60.071,70.231 ; U3.6@60.523,70.401 60.071,70.231 ; U3.6@60.554,70.231 60.071,70.231 ; U3.6@61.227,70.231 60.071,70.231 ; 56.858,70.65 57.277,70.231 58.039,70.231 58.331,69.939 ; 58.331,69.939 58.331,69.088 58.928,69.088 60.071,70.231
485_P: P2.2 R36.1 R37.2 U3.7 | length 35.7
  Top Layer w0.254: P2.2@52.518,69.041 54.031,69.088 ; P2.2@52.552,69.408 54.031,69.088 ; P2.2@52.574,68.676 54.031,69.088 ; P2.2@52.6,69.041 52.647,69.088 56.731,69.088 56.731,68.11 ; P2.2@52.627,69.654 54.031,69.088 ; P2.2@52.665,68.436 54.031,69.088 ; R37.2@56.437,69.046 56.731,68.11 ; R37.2@56.753,68.719 55.546,69.088 ; R37.2@56.753,69.457 55.546,69.088 ; R37.2@57.168,68.989 56.731,68.11 ; R36.1@58.038,66.723 58.331,67.526 ; R36.1@58.408,66.675 58.331,67.526 ; R36.1@58.508,66.675 59.182,66.675 ; R36.1@58.611,66.317 59.182,66.675 ; R36.1@58.611,67.033 59.182,66.675 ; R36.1@58.763,66.789 58.331,67.526 ; U3.7@60.43,69.082 59.614,68.123 ; U3.7@60.554,68.961 59.614,68.123 ; U3.7@60.66,68.824 59.614,68.123 ; U3.7@61.227,68.961 U3.7@60.706,68.961 ; U3.7@61.481,68.961 U3.7@60.706,68.961 ; 55.546,69.088 56.808,69.088 56.731,68.11 ; 56.731,68.11 57.023,67.818 58.039,67.818 58.331,67.526 ; 58.331,67.526 58.331,66.675 59.182,66.675 ; 59.182,66.675 59.563,67.056 59.563,68.072 60.452,68.961 U3.7@60.706,68.961
485DIR: U2.21 U3.2 U3.3 | length 35.1
  Top Layer w0.254: U3.3@65.328,70.06 v1(64.77,70.231) ; U3.3@65.328,70.402 v1(64.77,70.231) ; U3.3@65.354,70.231 v1(64.77,70.231) ; U3.2@65.982,68.975 66.154,70.023 U3.2@66.326,68.975 ; U3.3@65.982,70.217 66.154,69.169 U3.3@66.326,70.217 ; U3.3@65.981,70.24 U3.2@66.014,69.172 ; U3.3@65.985,70.195 U3.2@66.294,69.172 ; U3.2@66.154,68.961 U3.3@66.154,70.231 ; U3.3@66.323,70.195 U3.2@66.014,69.172 ; U3.3@66.327,70.24 U3.2@66.294,69.172 ; v1(75.311,79.248) U2.21@76.331,79.14 ; v1@75.419,79.14 U2.21@76.667,79.14 ; v1(64.77,70.231) U3.3@66.154,70.231 ; U3.2@66.014,69.172 U3.3@66.154,70.231 ; U3.3@66.154,70.231 U3.2@66.294,69.172
  VCC w0.254: v1(64.77,70.231) 64.77,73.787 67.945,76.962 72.771,76.962 75.057,79.248 ; 74.399,78.59 v1(75.311,79.248) ; 75.057,79.248 v1(75.311,79.248) ; 75.057,79.248 v1(75.311,79.248)
CLK_N: R27.2 U2.3 | length 7.7
  Top Layer w0.254: R27.2@64.733,79.544 65.97,79.94 ; R27.2@64.897,79.159 65.189,79.159 65.97,79.94 ; R27.2@64.897,79.209 65.97,79.94 ; R27.2@65.149,78.934 65.97,79.94 ; U2.3@68.367,79.94 65.97,79.94
CLK_P: R26.2 U2.2 | length 8.2
  Top Layer w0.254: R26.2@64.677,81.526 65.936,80.838 ; R26.2@64.897,81.827 65.936,80.838 ; R26.2@64.897,81.877 66.034,80.74 U2.2@68.367,80.74 ; R26.2@65.187,82.061 65.936,80.838
CS_N: L1.1 R14.2 U1.26 | length 112.4
  VCC w0.254: v1(100.203,83.185) 91.059,83.185 90.678,82.804 90.678,68.453 86.106,63.881 75.438,63.881 67.818,56.261 67.818,54.229 ; 67.818,54.229 v1(68.072,53.975) 67.818,54.229
  Bottom Layer w0.254: v1(68.072,53.975) R14.2@70.864,53.975 ; R14.2@70.447,52.667 68.602,53.975 ; R14.2@70.447,55.283 68.602,53.975 ; R14.2@70.587,52.891 68.602,53.975 ; R14.2@70.587,55.059 68.602,53.975 ; R14.2@70.699,53.126 68.602,53.975 ; R14.2@70.699,54.824 68.602,53.975 ; R14.2@70.781,53.37 68.602,53.975 ; R14.2@70.781,54.58 68.602,53.975 ; R14.2@70.836,53.619 68.602,53.975 ; R14.2@70.836,54.331 68.602,53.975 ; U1.26@101.194,83.189 v1(100.203,83.185) ; U1.26@101.392,83.189 v1@100.207,83.189 ; v1(100.203,83.185) 100.792,83.189 v1@100.207,83.189 ; v1(100.203,83.185) v1@100.207,83.189
  Bottom Layer w1.27: R14.2@70.396,55.002 73.15,56.261 ; R14.2@70.864,53.975 73.15,56.261 ; R14.2@70.864,54.275 73.15,56.261 ; R14.2@71.519,53.71 73.15,56.261 ; L1.1@76.981,57.845 73.15,56.261 ; L1.1@77.146,55.157 73.15,56.261 ; L1.1@77.288,56.261 73.15,56.261 ; L1.1@77.288,56.515 73.15,56.261
CS_P: C1.1 C2.2 C3.2 C9.2 C30.2 C31.2 D5.2 P1.1 R9.2 R13.1 R14.1 R39.1 T4.1 U1.23 U1.25 U4.3 | length 386.5
  Top Layer w0.254: v1(99.695,81.026) v1(99.695,82.55)
  Top Layer w1.27: C1.1@64.262,55.578 C1.1@64.595,55.245
  VCC w0.254: v1(63.5,58.928) v1(63.5,66.421) ; v1(67.056,53.975) 67.31,54.229 67.31,56.515 75.184,64.389 85.852,64.389 90.17,68.707 90.17,83.014 91.103,83.947 v1(95.123,83.947)
  VCC w0.381: v1(64.77,56.896) 74.041,66.167 84.074,66.167 86.487,68.58 v1(86.487,82.804)
  Bottom Layer w0.254: R39.1@63.135,67.274 v1(63.5,66.421) ; R39.1@63.5,67.349 v1(63.5,66.421) ; R39.1@63.5,67.399 v1(63.5,66.421) ; R39.1@63.865,67.274 v1(63.5,66.421) ; R14.1@64.264,53.975 v1(66.04,53.975) ; R14.1@64.3,53.62 v1(66.04,53.975) ; R14.1@64.3,54.33 v1(66.04,53.975) ; R14.1@64.369,53.373 v1(66.04,53.975) ; R14.1@64.369,54.577 v1(66.04,53.975) ; R14.1@64.475,53.136 v1(66.04,53.975) ; R14.1@64.475,54.814 v1(66.04,53.975) ; R14.1@64.617,52.913 v1(66.04,53.975) ; R14.1@64.617,55.037 v1(66.04,53.975) ; R14.1@64.795,52.709 v1(66.04,53.975) ; R14.1@64.795,55.241 v1(66.04,53.975) ; v1(67.056,53.975) v1(66.04,53.975) ; R9.2@95.734,81.854 96.101,82.842 ; R13.1@95.817,84.745 v1(95.123,83.947) ; R9.2@96.101,81.788 96.101,82.842 ; R13.1@96.101,84.455 95.593,83.947 ; R13.1@96.17,84.101 v1(95.123,83.947) ; R9.2@96.468,81.854 96.101,82.842 ; v1@99.855,82.539 U1.25@100.792,82.539 ; U1.23@100.855,81.239 v1(99.695,81.026) ; U1.23@101.392,81.239 99.908,81.239 ; U1.25@101.392,82.539 99.706,82.539 v1(99.695,82.55) ; v1(95.123,83.947) R13.1@96.051,84.455 ; v1(95.123,83.947) 95.593,83.947 ; 95.593,83.947 R13.1@96.051,84.455 ; 95.593,83.947 95.716,84.62 95.593,83.947 ; 95.593,83.947 96.249,84.139 95.593,83.947 ; 95.593,83.947 R13.1@96.051,84.455 ; v1(99.695,81.026) 100.792,81.239 99.908,81.239 ; v1(99.695,81.026) 99.908,81.239 ; v1(99.695,82.55) 100.686,82.539 v1(99.695,82.55)
  Bottom Layer w0.381: P1.1@54.2,57.213 52.242,59.428 ; P1.1@54.472,57.487 52.242,59.428 ; P1.1@54.704,57.791 52.242,59.428 ; P1.1@55.018,58.41 52.242,59.428 ; P1.1@55.126,58.776 52.242,59.428 ; P1.1@55.186,59.157 52.242,59.428 ; C30.2@55.991,66.804 56.156,68.463 ; C30.2@56.042,66.831 56.35,68.445 C30.2@56.658,66.831 ; C31.2@56.042,69.059 56.35,67.445 ; C31.2@56.042,69.117 56.35,70.731 C31.2@56.658,69.117 ; C30.2@56.095,66.857 56.544,68.463 ; C31.2@56.118,69.514 U4.3@56.412,70.952 ; C30.2@56.269,66.494 54.737,66.802 ; C30.2@56.269,67.11 54.737,66.802 ; C31.2@56.35,69.508 U4.3@56.412,70.952 ; U4.3@56.35,71.29 C31.2@56.35,69.088 C30.2@56.35,66.802 ; C30.2@56.4,66.802 56.544,68.463 ; C31.2@56.594,69.451 U4.3@56.412,70.952 ; C30.2@56.605,66.857 56.156,68.463 ; C31.2@56.658,69.059 56.35,67.445 ; C30.2@56.709,66.804 56.544,68.463 ; C9.2@87.842,83.562 v1(86.487,82.804) ; C9.2@87.91,82.182 v1(86.487,82.804) ; C9.2@87.987,83.205 v1(86.487,82.804) ; C9.2@88.019,82.552 v1(86.487,82.804) ; C9.2@88.038,82.88 v1(86.487,82.804) ; C9.2@88.238,82.88 90.282,82.842 ; C9.2@88.258,82.552 90.282,82.842 ; C9.2@88.27,83.207 90.282,82.842 ; C9.2@88.348,82.179 90.282,82.842 ; C9.2@88.374,83.576 90.282,82.842 ; 98.196,82.842 v1(99.695,82.55) ; 52.242,59.428 P1.1@54.879,58.091 53.579,58.091 51.816,59.854 51.816,63.881 54.737,66.802 ; 54.737,66.802 56.3,66.802 56.156,68.463 ; 54.737,66.802 C30.2@56.35,66.802 ; C30.2@56.35,66.802 56.35,67.445 ; C30.2@56.35,66.802 56.35,67.445 ; 56.35,67.445 56.65,66.876 56.35,67.445 ; 56.35,67.445 56.05,66.876 56.35,67.445 ; v1(86.487,82.804) 88.062,82.804 88.1,82.842 96.101,82.842 99.403,82.842 ; 99.403,82.842 v1(99.695,82.55) ; 99.403,82.842 v1(99.695,82.55) ; 99.403,82.842 v1(99.695,82.55)
  Bottom Layer w1.27: D5.2@58.293,57.698 T4.1@58.293,53.34 D5.2@58.293,58.198 ; D5.2@57.944,58.547 P1.1@54.879,58.091 D5.2@58.293,58.198 ; D5.2@57.944,58.547 55.047,57.448 D5.2@58.293,58.198 ; D5.2@57.944,58.547 54.852,58.755 D5.2@58.293,58.198 ; D5.2@57.944,58.547 55.335,58.547 D5.2@58.293,58.198 ; D5.2@58.293,58.198 61.622,58.598 D5.2@58.293,58.598 ; D5.2@58.293,58.198 C2.2@61.722,58.598 ; D5.2@58.293,58.198 D5.2@58.293,58.598 ; D5.2@58.293,58.598 C2.2@61.722,58.598 ; C2.2@61.722,58.598 v1(63.5,58.928) ; C2.2@61.722,58.598 v1(63.5,58.928) ; C2.2@61.722,58.598 C3.2@64.924,58.598 ; C2.2@61.722,58.598 C3.2@65.024,58.598 ; C2.2@61.822,58.598 v1(63.5,58.928) ; C2.2@61.822,58.598 v1(63.5,58.928) ; C2.2@61.822,58.598 C3.2@64.924,58.598 ; C2.2@61.822,58.598 C3.2@65.024,58.598 ; R14.1@63.431,54.508 v1(64.77,56.896) ; R14.1@63.431,54.508 v1(64.77,56.896) ; R14.1@63.431,54.508 v1(63.5,56.896) ; R14.1@63.431,54.508 v1(63.5,56.896) ; R14.1@63.431,54.508 C3.2@64.924,58.598 ; R14.1@63.431,54.508 C3.2@65.024,58.598 ; v1(63.5,56.896) C3.2@64.924,58.598 ; v1(63.5,56.896) C3.2@65.024,58.598 ; v1(63.5,58.928) C3.2@64.924,58.598 ; v1(63.5,58.928) C3.2@64.924,58.598 ; v1(63.5,58.928) C3.2@65.024,58.598 ; v1(63.5,58.928) C3.2@65.024,58.598 ; R14.1@64.264,54.275 v1(64.77,56.896) ; R14.1@64.264,54.275 v1(64.77,56.896) ; R14.1@64.264,54.275 C3.2@64.924,58.598 ; R14.1@64.264,54.275 C3.2@65.024,58.598 ; v1(64.77,56.896) C3.2@64.924,58.598 ; v1(64.77,56.896) C3.2@64.924,58.598 ; v1(64.77,56.896) C3.2@65.024,58.598 ; v1(64.77,56.896) C3.2@65.024,58.598 ; v1(64.77,56.896) 65.127,54.21 C3.2@65.024,58.598 ; v1(64.77,56.896) C3.2@65.024,58.598 ; v1(64.77,56.896) 65.024,54.735 C3.2@65.024,58.598 ; v1(64.77,56.896) C3.2@65.024,58.598
  other v1: 64.262,51.562 62.23,52.705 62.23,53.975 62.23,55.245 62.23,56.896 66.04,56.896